# Altium PCB PCB1.PcbDoc (part 2 of 4)
Units mm, origin at the board's own origin, x right, y up, seen from the top; angles counter-clockwise.
Board outline 200 x 55 mm, 4 copper layers (Top Layer, Power Layer, GND Layer, Bottom Layer), stack 1.714 mm thick; 403 components, 272 nets, 1346 pads, 787 vias.
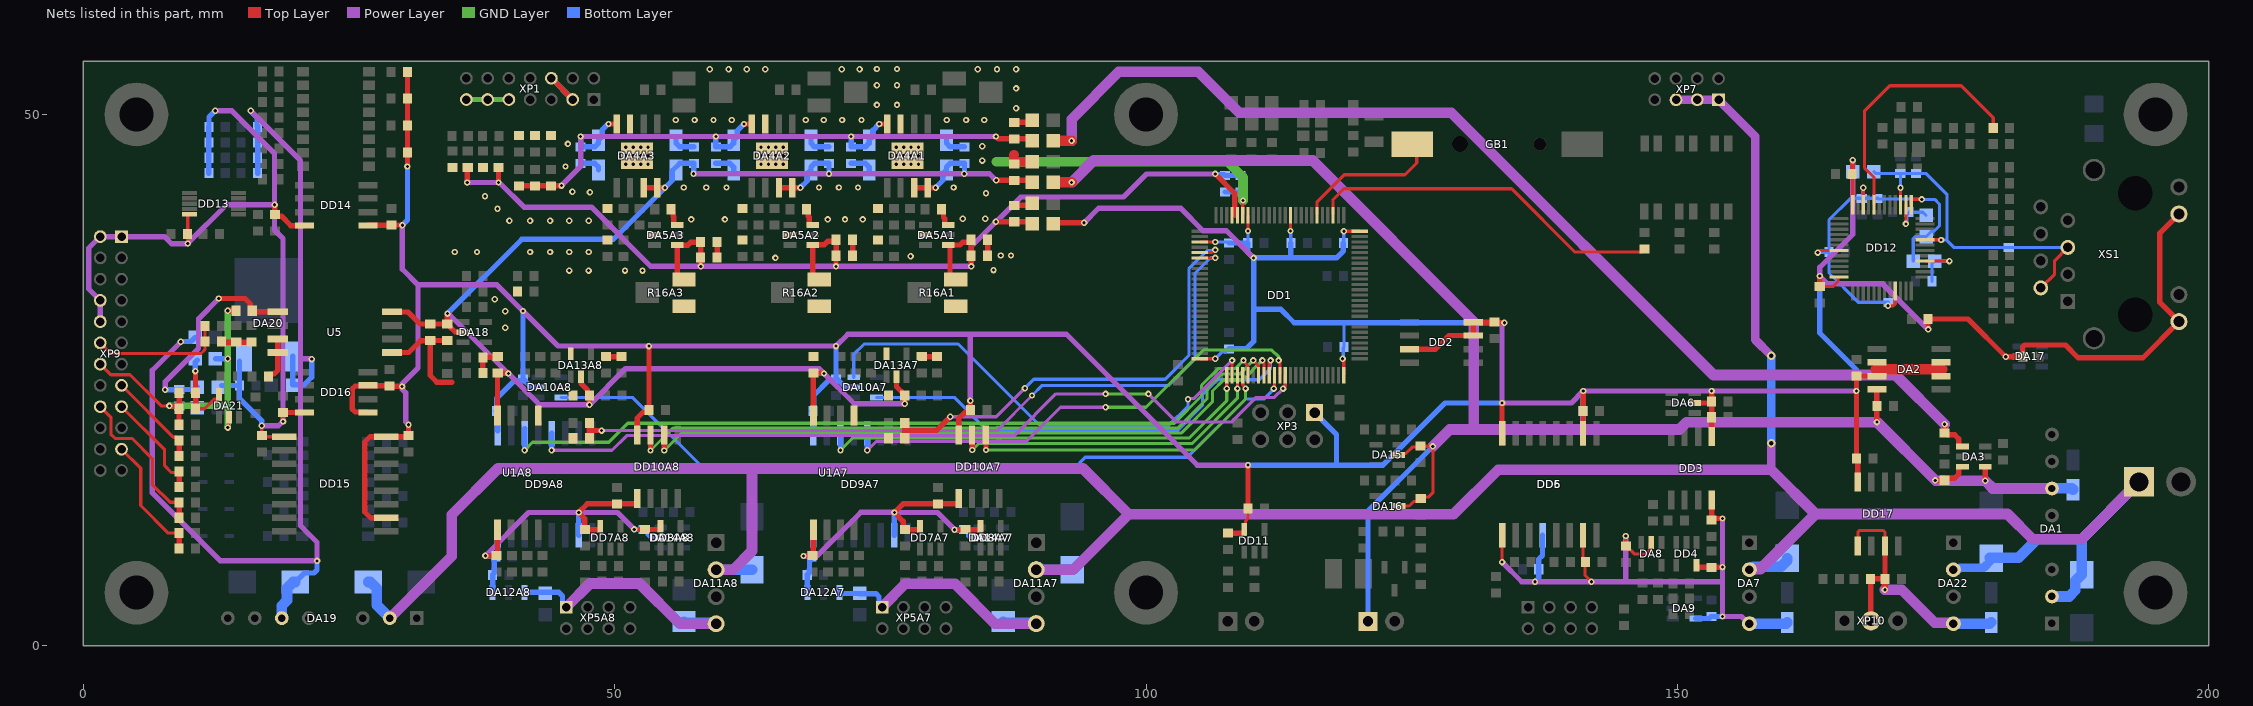
[diagram p4: the nets of this part, all layers, seen from the top]

## Part data
C1 C2 C28A1 C28A2 C28A3 C31A1 C31A2 C31A3 C39 C41 C51A7 C51A8 C58A7 C58A8 C111 C115 C120 C123: library part Capacitor_Polar
  C1 C39 C51A7 C51A8 C111 C115 C120: Model="TECAP, 10 мкФ, 35 В, тип C, 10%"
  C2 C28A1 C28A2 C28A3 C31A1 C31A2 C31A3 C41 C123: Model="TECAP, 10 мкФ, 10 В, тип A, 10%"
  C58A7 C58A8: Model="TECAP, 10 мкФ, 25 В, тип B, 10%"
C3 C4 C5 C6 C7 C8 C9 C10 C11 C12 C13 C14 C15 C16 C17 C18 C19 C20 C21 C22 C24 C26 C27A1 C27A2 C27A3 C29A1 C29A2 C29A3 C30A1 C30A2 C30A3 C32A1 C32A2 C32A3 C33A1 C33A2 C33A3 C34A1 C34A2 C34A3 C35A1 C35A2 C35A3 C36A4 C36A5 C37 C38 C40 C42 C43 C44 C45 C46 C47 C48 C49 C50 C52A7 C52A8 C53A7 C53A8 C54A7 C54A8 C55A7 C55A8 C56A7 C56A8 C57A7 C57A8 C59A7 C59A8 C60A7 C60A8 C61A7 C61A8 C62A7 C62A8 C63A7 C63A8 C64A7 C64A8 C65A7 C65A8 C66A7 C66A8 C67A7 C67A8 C68A7 C68A8 C69A7 C69A8 C70A7 C70A8 C71A7 C71A8 C72A7 C72A8 C73 C74 C75 C76 C77 C78 C79 C81 C82 C83 C84 C86 C88 C89 C90 C91 C92 C93 C94 C95 C96 C97 C98 C99 C100 C101 C102 C103 C104 C105 C106 C107 C108 C109 C110 C112 C113 C114 C116 C117 C118 C119 C121 C122 C124: library part Capacitor, Manufacturer=Murata
  C3 C4 C9 C10 C11 C12 C13 C14 C15 C17 C19 C20 C21 C26 C29A1 C29A2 C29A3 C30A1 C30A2 C30A3 C32A1 C32A2 C32A3 C34A1 C34A2 C34A3 C36A4 C36A5 C37 C38 C40 C42 C43 C45 C46 C47 C48 C49 C52A7 C52A8 C53A7 C53A8 C54A7 C54A8 C56A7 C56A8 C57A7 C57A8 C59A7 C59A8 C60A7 C60A8 C61A7 C61A8 C64A7 C64A8 C65A7 C65A8 C66A7 C66A8 C68A7 C68A8 C69A7 C69A8 C71A7 C71A8 C72A7 C72A8 C74 C75 C78 C79 C81 C82 C83 C84 C86 C88 C89 C90 C91 C92 C93 C94 C95 C96 C97 C98 C100 C101 C102 C103 C105 C106 C107 C109 C110 C113 C114 C117 C118 C119 C121 C122 C124: Model=GRM188R71H104KA93D
  C5 C7 C8: Model=GRM188R61E106KA73D
  C6 C73 C77 C116: Model=GRM188R61H105KAALD
  C16 C18 C35A1 C35A2 C35A3: Model=GRM188R61H225KE11D
  C22 C24: Model=GRM1885C1H180FA01D
  C27A1 C27A2 C27A3 C33A1 C33A2 C33A3: Model=GRM1885C1H220JA01D
  C44 C67A7 C67A8: Model=GRM188R71H103JA01D
  C50: Model=GRM188R71H152KA01D
  C55A7 C55A8 C62A7 C62A8 C70A7 C70A8 C76 C99 C104 C108: Model=GRM1885C1H101JA01D
  C63A7 C63A8 C112: Model=GRM219R71H334KA88D
C23 C25 C80 C85 C87: library part Capacitor, Manufacturer=Yageo
  C23 C25 C85 C87: Model=CC0603CRNPO9BN8R0
  C80: Model=CC1206KKX7RDBB102
DA1: library part TMR3, Manufacturer="Traco Power", Model="TMR 6-2411"
DA2: library part LD1117D33, Manufacturer=STMicroelectronics, Model=LD1117D33CTR
DA3 DA9: Manufacturer="Texas Instruments"
  DA3: Model=LM2776DBVR
  DA9: Model=LMV721M5
DA4A1 DA4A2 DA4A3 DD6 DD13: Manufacturer="Analog Devices"
  DA4A1 DA4A2 DA4A3: Model=ADA4817-1ARDZ
  DD6: Model=ADM3054BRWZ
  DD13: Model=ADM101EARM
DA5A1 DA5A2 DA5A3: library part TLV3501, Manufacturer="Texas Instruments", Model=TLV3501AIDBVR
DA6 DA10A7 DA10A8: library part SN74LVC1G3157, Manufacturer="Texas Instruments", Model=SN74LVC1G3157DBV
DA7 DA22: library part TME, Manufacturer="Traco Power", Model="TME 2405S"
DA8 DA13A7 DA13A8 DA14A7 DA14A8 DA15 DA16 DA18: library part LMC7101, Manufacturer="Texas Instruments", Model=LMC7101BIM5
DA11A7 DA11A8: library part TMU3, Manufacturer="Traco Power", Model="TMU 3-2412"
DA12A7 DA12A8: library part LD2981ABU50TR, Manufacturer=STMicroelectronics, Model=L78L05ABUTR
DA17: library part TPD4S009, Manufacturer="Texas Instruments", Model=TPD4S009DBVR
DA19: library part TMR4, Manufacturer="Traco Power", Model="TMR 4-2415"
DA20: library part L78M, Manufacturer=STMicroelectronics, Model=L78M05CDT-TR
DA21: library part LM7301IM5, Manufacturer="Texas Instruments", Model=LM7301IM5X/NOPB
DD1: library part STM32F405VG, Manufacturer=STMicroelectronics, Model=STM32F405VGT6
DD2: library part W25Q, Manufacturer=Winbond, Model=W25Q16JVSNIQ
DD3 DD10A7 DD10A8: library part ADUM1200, Manufacturer="Analog Devices", Model=ADUM1200CR
DD4: library part SN74AHC1G14, Manufacturer="Texas Instruments", Model=SN74AHC1G14DBV
DD5: library part ADUM1401, Manufacturer="Analog Devices", Model=ADUM1401CRW
DD7A7 DD7A8 DD8A7 DD8A8 DD11: library part SN74LVC1G17, Manufacturer="Texas Instruments", Model=SN74LVC1G17DBV
DD9A7 DD9A8 DD15: library part ADUM1400, Manufacturer="Analog Devices", Model=ADUM1400CRW
DD12: library part W5100S, Manufacturer=Wiznet, Model=W5100S-L
DD14: library part ADUM1201, Manufacturer="Analog Devices", Model=ADUM1201CR
DD16 DD17: library part ADUM1100, Manufacturer="Analog Devices", Model=ADUM1100BR
GB1: library part Accumulator, Manufacturer=Connfly, Model=DS1092-12-N8S
L1 L2 L3 L4 L5 L6 L7 L8: library part Inductor, Manufacturer=Murata, Model=BLM21PG221SN1D
R1 R2 R3 R4 R5 R6 R7 R8 R10A1 R10A2 R10A3 R12A1 R12A2 R12A3 R13A1 R13A2 R13A3 R14A1 R14A2 R14A3 R15A1 R15A2 R15A3 R17A4 R17A5 R18A4 R18A5 R19 R20 R21 R22 R23 R24 R25 R26 R27 R28A7 R28A8 R29A7 R29A8 R30A7 R30A8 R31A7 R31A8 R32A7 R32A8 R33A7 R33A8 R34A7 R34A8 R35A7 R35A8 R36A7 R36A8 R37A7 R37A8 R38A7 R38A8 R39A7 R39A8 R40 R41 R42 R43 R44 R45 R46 R47 R48 R49 R50 R51 R52 R53 R54 R55 R56 R57 R58 R59 R60 R61 R62 R63 R64 R65 R66 R67 R68 R69 R70 R71 R72 R73 R74 R75 R76 R77 R78 R79 R80 R81 R82 R83 R84 R85 R86 R87 R88 R89 R90 R91 R92 R93 R94 R95 R96 R97 R98 R99 R100 R101 R102 R103 R108 R109 R110 R111 R112 R113 R114 R115 R116: library part Resistor, Manufacturer=Yageo
  R1 R2 R3 R108 R110: Model=RC0805FR-070RL
  R4 R5 R13A1 R13A2 R13A3 R14A1 R14A2 R14A3 R15A1 R15A2 R15A3 R17A4 R17A5 R18A4 R18A5 R19 R22 R24 R26 R28A7 R28A8 R29A7 R29A8 R31A7 R31A8 R32A7 R32A8 R33A7 R33A8 R34A7 R34A8 R35A7 R35A8 R37A7 R37A8 R39A7 R39A8 R40 R42 R44 R45 R51 R66 R67 R68 R69 R70 R71 R73 R74 R75 R76 R77 R78 R79 R84 R85 R86 R87 R88 R89 R90 R91 R94 R99 R109 R111 R112 R114 R115 R116: Model=RC0603FR-0710KL
  R6 R7 R8 R43 R47 R48 R49 R95 R96 R97 R98: Model=RC0603FR-07200RL
  R10A1 R10A2 R10A3 R65 R100 R101 R102 R103: Model=RC0603FR-070RL
  R12A1 R12A2 R12A3: Model=RC0603FR-075K1L
  R20 R23: Model=RC0603FR-079K1L
  R21: Model=RC0603FR-07120RL
  R25 R27: Model=RC0603FR-073K6L
  R30A7 R30A8: Model=RC0603FR-0715KL
  R36A7 R36A8 R38A7 R38A8 R92 R93: Model=RC0603FR-0716K5L
  R41 R64: Model=RC0603FR-0712KL
  R46: Model=RC1210FR-0710RL
  R50 R58 R61: Model=RC0603FR-071KL
  R52 R53 R54 R55: Model=RC0603FR-0749R9L
  R56 R57 R59 R60: Model=RC0603FR-073R3L
  R62: Model=RC0603FR-07300RL
  R63: Model=RC0603FR-071ML
  R72: Model=RC0603FR-0740K2L
  R80 R81 R82 R83: Model=RC0603FR-07390RL
  R113: Model=RC0603FR-076K04L
R9A1 R9A2 R9A3 R16A1 R16A2 R16A3: library part Resistor_Variable, Manufacturer=Bourns
  R9A1 R9A2 R9A3: Model=3224W-1-205E
  R16A1 R16A2 R16A3: Model=3224W-1-103
R11A1 R11A2 R11A3 R104 R105 R106 R107: library part Resistor
U1A7 U1A8 U5: library part ACPL-C87, Manufacturer=Broadcom, Model=ACPL-C87A-500E
U2 U3 U4: library part TLP291, Manufacturer=Toshiba, Model=TLP291(GB-TP,SE
U6 U7: library part TLP281-4, Manufacturer=Toshiba, Model=TLP291-4
VD1 VD2 VD3: library part LED, Manufacturer=Kingbright
  VD1: Model=KP-2012MGC
  VD2: Model=KP-2012SYC
  VD3: Model=KP-2012EC
VD4 VD5 VD6 VD7: library part Diode_Zener, Manufacturer=Nexperia, Model=BZX384-C5V1
VT1: library part "MOSFET N-channel", Manufacturer=UMW, Model=AO3400A
XP1: library part Connector-14, Manufacturer=JST, Model=B14B-PHDSS
XP2 XP6 XP8: library part Connector-2, Manufacturer=JST
  XP2: Model=B2P-VH
  XP6 XP8: Model=B2B-EH-A
XP3: library part Connector-6, Manufacturer=Connfly, Model=PLD-6
XP4 XP5A7 XP5A8 XP7: library part Connector-8, Manufacturer=JST, Model=B8B-PHDSS
XP9: library part Connector-24, Manufacturer=JST, Model=B24B-PHDSS
XP10: library part Connector-3, Manufacturer=JST, Model=B3B-EH-A
XS1: Manufacturer=LINK-PP, Model=LPJD0012BENL
ZQ1: library part Quartz_Resonator, Manufacturer=NDK, Model="NX3215SA- 32.768K-STD-MUA-8"
ZQ2: library part Quartz_Resonator_4-pin, Manufacturer=NDK, Model=NX2520SA-16MHZ-STD-CSW-5
ZQ3: library part Quartz_Resonator_4-pin, Manufacturer=TXC, Model=7M-25.000MAAJ-T

## Free pads (board coordinates)
  round 6 hole 3.2: ""(5,5) ""(5,50) ""(100,5) ""(100,50) ""(195,5) ""(195,50)

## Via types
v1: diameter 0.6, hole 0.3, Top Layer to Bottom Layer, tented both sides, 747 vias
v2: diameter 0.6, hole 0.3, Top Layer to Bottom Layer, 36 vias
v3: diameter 0.8, hole 0.4, Top Layer to Bottom Layer, tented both sides, 4 vias

## Nets (pads, with @x,y where several pads share a name; then routed paths per layer and width w, separated by ;. In a path a pad name is that pad's centre, name@x,y a point inside that pad or via, vN(x,y) a via of type N, cw(c..) or ccw(c..) an arc to the next point about the centre after c; other vN are vias at no path point)
1V2A: C89.1 DD12.4 L5.2 | length 5.7
  Top Layer w0.3: DD12.4@173.3,36.2 v1(175.6,36.2)
  Bottom Layer w0.3: C89.1@173.95,34.3 173.95,35.95 L5.2@174.2,36.2 v1(175.6,36.2)
1V2D: C88.1 C92.1 C94.1 C95.1 DD12.13 DD12.22 DD12.31 DD12.45 L4.2 L5.1 | length 39.8
  Top Layer w0.3: v1(163.208,37) 163.408,37.2 DD12.31@165.2,37.2 ; DD12.22@167.5,41.5 167.5,42.3 v1(167.5,43.1) ; v1(169.821,32) 169.839,31.982 170.324,31.982 170.5,32.158 DD12.45@170.5,33.4 ; DD12.13@172,41.5 172,42 v1(173,42)
  Bottom Layer w0.3: v1(163.208,37) 164.22,37 C95.1@164.27,37.05 ; C92.1@167.5,42.11 C88.1@168.85,42.11 168.905,42.055 172.945,42.055 v1(173,42) 174.205,42 174.665,41.54 174.665,39.511 174.139,38.985 173.885,38.985 L4.2@173.4,38.5 172.376,38.5 172.2,38.324 L5.1@172.2,36.2 ; v1(167.5,43.1) 167.5,42.26 C92.1@167.35,42.11 166.31,42.11 164.27,40.07 164.27,37.2 C95.1@164.27,37.05 ; v1(169.821,32) 169.821,32.291 C94.1@169.85,32.32 167.03,32.32 164.27,35.08 C95.1@164.27,37.05
1V2O: C84.1 DD12.14 L4.1 | length 4.7
  Top Layer w0.3: v1(171.5,39.7) DD12.14@171.5,41.5
  Bottom Layer w0.3: v1(171.5,39.7) 171.577,39.777 171.577,40.577 C84.1@171.8,40.8 173.1,40.8 L4.1@173.4,40.5
+3.3V: C7.1 C9.1 C13.2 C14.2 C15.2 C19.1 C20.1 C26.1 C37.1 C38.1 C42.1 C43.1 C56A7.1 C56A8.1 C57A7.1 C57A8.1 C69A7.1 C69A8.1 C78.1 C81.1 C86.1 C91.1 C106.1 C107.1 C109.1 C124.1 DA2.2 DA2.3 DA2.6 DA2.7 DA6.5 DA10A7.5 DA10A8.5 DA17.5 DD1.11 DD1.19 DD1.28 DD1.50 DD1.75 DD1.100 DD2.3 DD2.7 DD2.8 DD3.1 DD5.10 DD5.16 DD6.7 DD9A7.1 DD9A8.1 DD10A7.8 DD10A8.8 DD11.5 DD12.24 DD12.36 DD14.1 DD15.10 DD15.16 DD16.1 DD16.3 DD17.8 L2.1 L6.1 R51.2 R66.2 R86.1 R87.1 R89.1 R91.1 XP3.1 XS1.9 XS1.11 | length 495.6
  Top Layer w0.3: DD1.50@105.075,27 v1(106.525,27) ; DD1.28@105.075,38 v1(106.525,38) ; DD11.5@109.125,10.6 109.25,10.725 DD11.5@109.25,10.95 109.375,11.075 109.375,11.75 109.6,11.975 C78.1@109.6,12.9 ; v1(109.6,39.025) DD1.19@109.6,40.525 ; v1(113.6,39.025) DD1.11@113.6,40.525 ; v1(118.5,27) 118.5,26.919 118.6,26.819 DD1.75@118.6,25.475 ; v1(118.625,39) DD1.100@120.125,39 ; C91.1@163.4,33.8 164.644,33.8 165.12,34.276 165.12,34.7 DD12.36@165.2,34.7 ; C86.1@166.475,44.425 C86.1@166.45,44.4 166.5,44.35 DD12.24@166.5,41.5 ; v1@166.475,45.675 v1(166.5,45.7)
  Top Layer w0.5: DD16.1@26.8,21.95 26.75,22 25.593,22 25.3,22.293 25.3,24.157 25.593,24.45 26.75,24.45 DD16.3@26.8,24.5 26.825,24.475 C109.1@28.775,24.475 ; DD14.1@26.8,39.55 26.825,39.575 28.975,39.575 28.987,39.588 30.013,39.588 v1(30.025,39.575) ; DD15.16@28.485,19.685 28.468,19.667 26.992,19.667 26.48,19.155 26.48,12.61 27.04,12.05 DD15.10@28.5,12.05 ; DD15.16@28.5,19.67 30.47,19.67 C107.1@30.6,19.8 v1(30.6,20.8) ; C109.1@28.825,24.425 28.831,24.419 29.981,24.419 v1(30,24.4) ; v1(30.5,45.1) R91.1@30.5,46.4 R87.1@30.5,51.5 R86.1@30.5,54 ; DD10A8.8@52.125,19.85 52.125,21.429 52.646,21.95 53.05,21.95 53.225,22.125 C69A8.1@53.225,22.175 v1(53.225,28.2) ; DD10A7.8@82.375,19.85 82.375,21.369 82.956,21.95 83.3,21.95 83.475,22.125 C69A7.1@83.475,22.175 v1(83.475,23.05) ; L2.1@91.275,39.7 91.376,39.801 v1(94.174,39.801) ; R51.2@107.7,10.6 DD11.5@109.125,10.6 ; C78.1@109.6,12.9 v1(109.6,17) ; DD2.3@124.796,27.896 127.221,27.896 128.521,29.196 DD2.7@130.796,29.196 DD2.8@130.796,30.446 C26.1@132.796,30.446 132.818,30.423 133.702,30.423 v1(133.725,30.4) ; DD5.16@133.506,20.01 v1(133.506,22.85) ; DD5.10@141.126,20.01 C43.1@141.126,21.838 ; C43.1@141.15,21.786 v1(141.15,23.975) ; DA6.5@151.625,22.85 153.1,22.85 C38.1@153.225,22.975 ; C37.1@153.225,21.55 C38.1@153.225,22.975 ; v1(153.225,23.975) C38.1@153.225,22.975 ; DD3.1@153.231,19.7 C37.1@153.231,21.55 ; C91.1@163.4,33.8 v1(163.4,34.8) ; C86.1@166.475,44.425 v1@166.475,45.675 ; DD17.8@166.989,15.4 166.989,17.486 C124.1@166.85,17.625 v1(166.85,23.975) 166.862,23.987 166.862,25.387 C7.1@166.875,25.4 166.887,25.388 DA2.3@168.788,25.388 ; DA2.3@168.8,25.375 DA2.3@168.788,25.388 ; DA2.3@168.825,25.425 DA2.3@168.788,25.388 ; v1(173.6,29.775) 173.587,29.788 173.587,30.738 R66.2@173.575,30.75 177.35,30.75 v1(180.9,27.2) 182.475,27.2 C81.1@182.5,27.225 182.5,28.124 182.676,28.3 186.512,28.3 187.712,27.1 193.8,27.1 XS1.9@197.2,30.5 195.4,32.3 195.4,38.83 XS1.11@197.2,40.63
  Top Layer w1: 168.675,26.025 168.8,26.025 174.8,26.025 174.926,26.025
  Power Layer w0.5: 30.025,35.432 31.499,33.958 ; 30.025,35.482 v1(30.025,39.575) ; v1(30.6,20.8) 30.6,20.827 30.344,21.083 30.344,23.8 30.019,24.125 30.019,24.381 v1(30,24.4) 30.019,24.419 30.019,24.675 31.499,26.155 31.499,33.958 ; v1(70.825,28.2) v1(53.225,28.2) 44.675,28.2 v1(41.375,31.5) 41.356,31.519 38.917,33.958 31.499,33.958 ; v1@70.844,28.219 71.943,29.318 83.475,29.318 ; v1(83.475,23.05) 83.475,29.318 ; v1(94.174,39.801) 95.55,41.176 103.249,41.176 ; 103.275,41.176 103.249,41.176 ; v1(109.6,17) 104.825,17 92.507,29.318 83.475,29.318 ; v1(110.125,36.5) 107.575,39.05 105.375,39.05 103.249,41.176 ; v1(133.506,22.85) 140.025,22.85 v1@141.131,23.956 ; v1@133.506,22.877 133.506,30.154 133.725,30.373 v1(133.725,30.4) ; v1(141.15,23.975) v1(153.225,23.975) v1(166.85,23.975) ; v1(166.5,45.7) 166.5,38.711 163.4,35.611 v1(163.4,34.8) 164.145,34.055 169.32,34.055 v1(173.6,29.775)
  Bottom Layer w0.3: v1(106.525,27) 107.175,27.65 107.5,27.65 107.825,27.975 107.849,27.999 C15.2@107.849,28.024 ; v1(106.525,38) 107.725,38 C14.2@107.825,37.9 ; C9.1@109.575,37.9 109.587,37.912 109.587,39.013 v1(109.6,39.025) ; v1(113.6,39.025) 113.612,39.013 C13.2@113.612,37.9 ; v1(118.5,27) 118.557,27.057 118.557,28.032 C20.1@118.625,28.1 118.625,30.4 ; C19.1@118.575,37.9 118.6,37.925 118.6,38.975 v1(118.625,39) ; L6.1@166.5,44.6 v1(166.5,45.7) ; v1(180.9,27.2) 180.912,27.212 182.137,27.212 DA17.5@182.15,27.225
  Bottom Layer w0.5: v1(30.025,39.575) 30.025,39.602 30.5,40.077 v1(30.5,45.1) ; DD9A8.1@38.99,20.209 38.99,21.967 38.857,22.1 38.92,22.163 38.92,23.297 40.569,24.946 41.221,24.946 C56A8.1@41.375,25.1 ; C56A8.1@41.375,25.125 v1(41.375,31.5) ; C56A8.1@41.425,25.1 41.6,24.925 41.6,24.875 42.125,24.35 42.775,24.35 DA10A8.5@42.8,24.325 ; C57A7.1@68.575,22.1 C57A7.1@68.64,22.165 ; C57A7.1@68.622,22.183 C57A7.1@68.64,22.165 ; DD9A7.1@68.705,20.2 68.705,22.1 C57A7.1@68.64,22.165 ; C56A7.1@70.825,25.1 C56A7.1@70.825,25.175 ; v1(70.825,28.2) C56A7.1@70.825,25.175 ; C56A7.1@70.875,25.175 71.7,24.35 72.475,24.35 DA10A7.5@72.5,24.325 ; C15.2@107.825,27.975 109.451,27.975 110.125,28.649 110.125,31.654 ; C14.2@107.825,37.9 C9.1@109.575,37.9 109.575,37.05 v1(110.125,36.5) ; v1(109.6,17) 117.925,17 ; C13.2@113.625,37.9 113.625,36.5 ; XP3.1@115.865,21.94 117.925,19.88 117.925,17 ; C19.1@118.575,37.9 118.575,37.15 117.925,36.5 113.625,36.5 ; v1(133.506,22.85) 128.15,22.85 122.3,17 117.925,17 ; v1(133.725,30.4) 118.625,30.4 113.95,30.4 112.696,31.654 110.125,31.654 ; DD6.7@141.108,20.01 C42.1@141.108,22.052 ; C42.1@141.15,21.868 v1(141.15,23.975) ; v1(163.4,34.8) 163.4,29.425 166.85,25.975 v1(166.85,23.975) ; C57A7.1@68.64,22.165 68.75,22.275 68.75,23.575 70.175,25 70.65,25 C56A7.1@70.825,25.175 ; 110.125,31.654 v1(110.125,36.5) ; v1(110.125,36.5) 113.625,36.5
+3.3VA: C10.1 C12.2 C17.2 C34A1.1 C34A2.1 C34A3.1 C35A1.1 C35A2.1 C35A3.1 DA5A1.4 DA5A2.4 DA5A3.4 DD1.21 DD1.22 L2.2 R16A1.3 R16A2.3 R16A3.3 R17A4.1 R17A5.1 | length 116.3
  Top Layer w0.3: DD1.22@108.1,40.525 108.35,40.525 DD1.21@108.6,40.525
  Top Layer w0.5: v1(36.125,43.593) 36.144,43.612 36.144,44.994 R17A5.1@36.175,45.025 ; v1(39.073,43.59) R17A4.1@39.073,45.018 ; R16A3.3@56.525,34.475 56.3,34.475 55.9,34.875 DA5A3.4@55.9,37.7 56.892,37.7 57.172,37.98 C34A3.1@58.1,37.98 ; v1@58.1,35.895 C35A3.1@58.1,36.525 ; C35A3.1@58.1,36.33 C34A3.1@58.1,37.7 ; DA5A2.4@68.65,37.7 68.65,34.775 R16A2.3@68.95,34.475 ; DA5A2.4@68.8,37.7 68.825,37.725 69.717,37.725 70.043,38.051 70.696,38.051 C34A2.1@70.85,38.205 C35A2.1@70.85,36.705 70.838,36.692 70.838,35.713 v1(70.825,35.7) ; R16A1.3@82.1,34.475 81.95,34.475 81.55,34.875 81.55,37.7 81.554,37.704 82.482,37.704 82.757,37.98 83.375,37.98 83.55,38.155 C34A1.1@83.55,38.205 ; v1(83.55,35.7) C35A1.1@83.55,36.705 C34A1.1@83.55,37.98 ; v1(85.875,39.9) C10.1@87.6,39.9 ; C10.1@87.625,39.9 89.075,39.9 L2.2@89.275,39.7 ; v1@106.544,44.381 108.35,42.575 108.35,40.525
  Power Layer w0.5: v1(36.125,43.593) v1@39.119,43.593 ; v1@39.146,43.593 v1@39.119,43.593 ; v1(106.525,44.4) 100.05,44.4 97.875,42.225 88.225,42.225 83.55,37.55 v1(83.55,35.7) v1(70.825,35.7) v1(58.1,35.7) 53.399,35.7 47.824,41.275 41.463,41.275 39.167,43.571 39.119,43.571 v1@39.119,43.593
  Bottom Layer w0.5: v1@36.125,43.566 v1(36.125,43.593) ; v1(106.525,44.4) 106.582,44.343 107.332,44.343 C17.2@107.425,44.25 ; C17.2@107.433,44.258 C12.2@108.841,44.258
+3.3VA_ETH: C79.1 C90.1 C93.1 DD12.8 DD12.15 L6.2 XS1.2 XS1.5 | length 33.6
  Top Layer w0.3: DD12.15@171,41.5 v1(171,43.1) ; DD12.8@173.3,38.2 174.797,38.2 v1(174.816,38.182) ; XS1.2@184.2,33.677 185.5,34.977 185.5,36.247 XS1.5@186.74,37.487
  Bottom Layer w0.3: L6.2@168.5,44.6 168.65,44.45 C90.1@170.975,44.45 ; v1(171,43.1) 171,44.425 C90.1@170.975,44.45 ; v1(174.816,38.182) 175.382,38.182 ; XS1.5@186.74,37.487 C79.1@181.179,37.487 176.013,37.487 175.382,38.118 175.382,42.433 173.365,44.45 C93.1@172.442,44.45 C90.1@170.975,44.45
+5V: C2.1 C4.2 C5.1 C74.1 C75.1 DA1.6 DA2.4 DA3.3 DA3.4 DA15.2 DA16.2 L1.1 XP6.1 | length 160.3
  Top Layer w0.3: DA15.2@123.937,18.085 123.941,18.088 124.46,18.088 125.088,18.716 125.764,18.716 C74.1@125.837,18.788 125.849,18.776 126.974,18.776 v1(126.987,18.763) ; DA16.2@123.95,13.15 124.755,13.15 125.184,13.579 125.579,13.579 C75.1@125.85,13.85 ; C75.1@125.85,13.9 125.85,14.007 126.607,14.007 127,14.4 v1@127,18.763 ; C4.2@168.775,22.55 168.775,24.1 DA2.4@168.8,24.125
  Top Layer w0.5: v1(168.775,21.05) DA2.4@168.775,24.1 ; v1(174.27,15.56) 174.278,15.567 175.142,15.567 C5.1@175.15,15.575 175.325,15.75 176.075,15.75 176.475,16.15 176.475,16.825 176.493,16.843 DA3.3@176.818,16.843 ; v1(178.975,15.525) DA3.4@178.975,16.85
  Top Layer w1: L1.1@91.275,43.6 v1(93,43.6)
  Power Layer w1: v1(93,43.6) 95.058,45.658 115.692,45.658 130.85,30.5 130.85,20.35 ; v1@126.993,18.757 128.587,20.35 130.85,20.35 ; v1(174.27,15.56) 168.78,21.05 150.88,21.05 150.18,20.35 130.85,20.35 ; v1@174.305,15.525 v1(178.975,15.525) 179.7,14.8 DA1.6@185.169,14.8
  Bottom Layer w0.5: XP6.1@120.896,2.3 120.896,12.673 v1(126.987,18.763)
  Bottom Layer w1: DA1.6@185.25,14.82 187.125,14.82 187.225,14.72 C2.1@187.225,14.675
+5V_DRVA7: C54A7.1 C59A7.1 C60A7.1 C64A7.1 C65A7.1 C68A7.1 C71A7.1 DA12A7.1 DA14A7.2 DD7A7.5 DD8A7.5 DD9A7.10 DD9A7.16 DD10A7.1 U1A7.1 | length 44
  Top Layer w0.5: v1(67.775,8.45) 67.787,8.463 68.587,8.463 C54A7.1@68.6,8.475 ; C54A7.1@68.625,8.475 68.7,8.55 U1A7.1@68.7,10.925 ; v1(76.325,12.538) 77.137,13.35 C64A7.1@80.425,13.35 82.325,13.35 82.375,13.4 DD10A7.1@82.375,13.85 ; v1@76.344,12.519 77.151,11.712 77.151,11.099 C59A7.1@77.325,10.925 ; C59A7.1@77.55,10.925 78.725,10.925 78.75,10.95 DD7A7.5@78.75,11.25 ; v1(81.975,10.925) C60A7.1@83,10.925 84.4,10.925 84.425,10.95 DD8A7.5@84.425,11.25
  Power Layer w0.5: v1(67.775,8.45) 69.05,8.45 73.157,12.557 v1@76.279,12.557 ; v1(76.325,12.538) 80.362,12.538 v1(81.975,10.925)
  Bottom Layer w0.3: C71A7.1@83,10.925 83.196,10.729 83.196,10.351 83.372,10.175 DA14A7.2@84.475,10.175
  Bottom Layer w0.5: v1(67.775,8.45) 67.787,8.438 68.562,8.438 C65A7.1@68.575,8.425 ; C68A7.1@68.12,6.62 68.12,5.028 DA12A7.1@68.145,5.003 ; C68A7.1@68.125,6.675 68.3,6.85 68.3,7.157 68.336,7.193 68.336,7.907 68.4,7.971 C65A7.1@68.4,8.2 ; C65A7.1@68.705,8.505 DD9A7.16@68.705,10.6 ; DD9A7.10@76.325,10.4 76.325,12.199 ; v1(81.975,10.925) C71A7.1@83,10.925
+5V_DRVA8: C54A8.1 C59A8.1 C60A8.1 C64A8.1 C65A8.1 C68A8.1 C71A8.1 DA12A8.1 DA14A8.2 DD7A8.5 DD8A8.5 DD9A8.10 DD9A8.16 DD10A8.1 U1A8.1 | length 44.2
  Top Layer w0.5: v1(37.835,8.475) C54A8.1@38.875,8.475 38.985,8.585 U1A8.1@38.985,10.925 ; DD7A8.5@48.65,11.25 48.65,10.95 48.625,10.925 47.175,10.925 47.175,11.978 v1(46.615,12.538) 47.426,13.35 C64A8.1@50.225,13.35 52.075,13.35 52.125,13.4 DD10A8.1@52.125,13.85 ; v1(51.85,10.95) C60A8.1@52.875,10.95 54.275,10.95 54.3,10.975 DD8A8.5@54.3,11.25
  Power Layer w0.5: v1(37.835,8.475) 41.898,12.538 v1(46.615,12.538) 50.262,12.538 v1(51.85,10.95)
  Bottom Layer w0.3: C71A8.1@52.725,10.95 52.775,10.95 53.05,10.675 53.05,10.45 53.325,10.175 DA14A8.2@54.35,10.175
  Bottom Layer w0.5: v1(37.835,8.475) 38.915,8.475 38.99,8.55 DD9A8.16@38.99,10.4 ; C68A8.1@38.5,6.675 38.675,6.85 38.675,7.193 38.675,8.25 C65A8.1@38.85,8.425 ; DA12A8.1@38.525,5.025 C68A8.1@38.525,6.65 ; DD9A8.10@46.61,10.4 46.612,10.402 46.612,12.536 v1(46.615,12.538) ; v1(51.85,10.95) C71A8.1@52.725,10.95
+5V_FS: C121.1 C122.1 C123.1 DA22.4 DD17.1 DD17.3 XP10.2 | length 26.2
  Top Layer w0.3: DD17.1@166.989,9.4 166.99,10.685 167.166,10.861 169.363,10.861 169.539,10.685 DD17.3@169.539,9.4
  Top Layer w0.5: XP10.2@168.225,2.35 168.2,2.375 168.2,6.275 C121.1@168.175,6.3 C122.1@169.525,6.3 ; C122.1@169.539,6.311 DD17.3@169.539,9.4
  Top Layer w0.6: v1(169.525,5.275) 169.525,6.297 C122.1@169.539,6.311
  Power Layer w1: v1(169.525,5.275) 171.1,5.275 174.223,2.152 175.898,2.152 DA22.4@175.975,2.075
  Bottom Layer w0.6: DA22.4@175.899,2.151 DA22.4@175.975,2.075
  Bottom Layer w1: DA22.4@175.975,2.075 179.4,2.075 C123.1@179.525,2.2
+5V_HW: C96.1 C101.1 C102.1 C113.1 C114.1 DA20.3 DD13.10 DD14.8 DD15.1 DD16.8 L7.1 R104.2 R105.2 R106.2 R107.2 XP9.1 XP9.2 XP9.8 XP9.10 | length 89.2
  Top Layer w0.3: v1(9.825,37.85) C96.1@9.825,38.75 9.825,40.55 9.875,40.6 DD13.10@10,40.6 ; C102.1@16.8,19.8 v1(16.8,20.7) ; C102.1@17.1,19.695 17.125,19.67 DD15.1@18.8,19.67 ; v1(18.8,21.1) C113.1@18.8,21.95
  Top Layer w0.5: v1(18,41.5) 18.013,41.487 18.013,40.612 C101.1@18.025,40.6 18.2,40.425 18.637,40.425 19.525,39.536 20.786,39.536 DD14.8@20.8,39.55 ; C113.1@18.8,21.95 DD16.8@20.8,21.95
  Power Layer w0.5: XP9.10@1.6,30.5 XP9.8@1.6,32.5 0.518,33.582 0.518,37.418 XP9.2@1.6,38.5 XP9.1@3.6,38.5 7.625,38.5 8.294,37.831 v1@9.779,37.831 ; v1(9.825,37.85) 13.475,41.5 v1(18,41.5) ; v1(12.425,50.35) 13.956,50.35 18,46.306 v1(18,41.5) ; v1(16.8,20.7) 18.373,20.7 18.773,21.1 v1(18.8,21.1) ; v1@18.8,21.127 18.8,38.325 18,39.125 v1(18,41.5)
  Bottom Layer w0.5: R104.2@11.809,44.475 R105.2@11.809,45.925 R107.2@11.809,48.825 ; R107.2@11.825,48.8 11.825,49.75 v1(12.425,50.35) ; L7.1@13,24.5 C114.1@14.7,24.5 ; DA20.3@14.7,26.804 C114.1@14.7,24.5 ; v1@16.767,20.733 16.781,20.746 16.781,21.194 14.7,23.275 C114.1@14.7,24.5
+5V_PS: C40.1 C41.1 C45.1 C46.1 C47.1 C48.1 C49.1 DA7.4 DA8.2 DA9.5 DD3.8 DD4.5 DD5.1 DD5.7 DD6.13 | length 66
  Top Layer w0.3: v1@133.456,7.875 v1(133.506,7.875) DD5.1@133.506,10.41 ; DD5.7@141.126,10.41 141.126,8.13 C47.1@141.356,7.9 ; C47.1@141.356,7.875 141.313,7.875 141.313,6.619 v1(141.906,6.025) ; v1(145.15,10.325) C46.1@145.15,9.375 145.2,9.375 145.925,8.65 146.164,8.65 ; 146.114,8.65 146.164,8.65 ; DA8.2@147.55,9.725 147.425,9.6 147.425,9.051 147.024,8.65 146.164,8.65
  Top Layer w0.5: DD4.5@151.8,7.575 151.8,7.4 151.825,7.375 C45.1@153.225,7.375 153.238,7.388 154.237,7.388 v1(154.25,7.4) ; C40.1@153.225,11.85 C40.1@153.225,11.975 ; DD3.8@153.225,13.7 C40.1@153.225,11.975 ; v1(154.25,11.975) C40.1@153.225,11.975
  Power Layer w0.5: v1(133.506,7.875) 135.356,6.025 v1(136.606,6.025) v1(141.906,6.025) 145.15,6.025 ; v1@145.15,10.298 145.15,6.025 ; v1(154.25,11.975) v1(154.25,7.4) 154.25,6.025 ; DA7.4@156.781,2.08 156.709,2.08 156.039,2.75 v1(154.25,2.75) 154.25,6.025 ; 145.15,6.025 154.25,6.025
  Bottom Layer w0.5: v1(136.606,6.025) 136.956,6.375 C48.1@136.956,7.2 136.956,8.15 137.316,8.51 DD6.13@137.316,10.4 DD6.13@137.316,10.41 ; DA9.5@151.725,2.575 153,2.575 153.175,2.75 C49.1@153.225,2.75 v1(154.25,2.75)
  Bottom Layer w1: DA7.4@156.781,2.08 160.25,2.08 160.35,2.18 C41.1@160.35,2.2
+5VA: C3.1 C30A1.1 C30A2.1 C30A3.1 C31A1.1 C31A2.1 C31A3.1 C61A7.1 C61A8.1 C66A7.1 C66A8.1 C103.1 C105.1 DA4A1.7 DA4A1.8 DA4A2.7 DA4A2.8 DA4A3.7 DA4A3.8 DA13A7.2 DA13A8.2 DA18.2 L1.2 U1A7.8 U1A8.8 U5.8 | length 152.2
  Top Layer w0.5: U5.8@29.05,31.425 29.067,31.408 30.567,31.408 31.7,30.275 C103.1@32.65,30.275 32.654,30.279 34.246,30.279 C105.1@34.25,30.282 ; C105.1@34.263,30.295 34.263,31.245 v1(34.275,31.257) ; C105.1@34.3,30.282 34.475,30.107 34.475,30.057 35,29.532 35.7,29.532 DA18.2@35.725,29.507 ; U1A8.8@38.985,21.675 C61A8.1@38.985,25.625 ; C61A8.1@38.998,25.638 39.004,25.631 39.994,25.631 v1(40,25.625) ; DA13A8.2@46.825,25.325 46.85,25.3 46.85,24.675 47.45,24.075 47.45,23.725 C66A8.1@47.625,23.55 v1(47.625,22.675) ; DA4A3.7@52.75,43.105 DA4A3.8@54,43.105 54.005,43.1 v1(54.725,43.1) ; DA4A2.7@65.466,43.105 65.471,43.1 v1(67.475,43.1) ; U1A7.8@68.7,21.675 68.7,25.6 68.75,25.65 68.762,25.638 69.688,25.638 v1(69.7,25.625) ; DA13A7.2@76.525,25.325 76.525,24.375 C66A7.1@77.262,23.638 ; v1(77.3,22.775) C66A7.1@77.3,23.55 ; DA4A1.7@78.2,43.105 78.205,43.1 v1(80.2,43.1) ; v1(85.9,43.8) 89.075,43.8 L1.2@89.275,43.6
  Power Layer w0.5: v1(34.275,31.257) 34.294,31.238 34.387,31.238 v1@39.981,25.644 ; v1(40,25.625) 42.95,22.675 v1(47.625,22.675) 51.025,26.075 69.25,26.075 v1(69.7,25.625) 72.55,22.775 v1@77.273,22.775 ; v1@57.675,44.425 v1(70.175,44.425) 85.248,44.425 85.873,43.8 v1(85.9,43.8)
  Bottom Layer w0.5: v1(34.275,31.257) 41.262,38.244 49.869,38.244 v1(54.725,43.1) 55.425,43.8 55.425,44.7 56.125,45.4 C30A3.1@57.45,45.4 57.437,45.387 57.437,44.438 v1(57.425,44.425) ; v1@67.494,43.119 68.125,43.75 68.125,44.425 C31A2.1@68.475,44.775 68.475,45.05 68.825,45.4 C30A2.1@70.175,45.4 v1(70.175,44.425) ; v1@80.219,43.119 80.875,43.775 80.875,44.425 C31A1.1@81.225,44.775 81.225,45.05 81.575,45.4 C30A1.1@82.925,45.4 82.912,45.387 82.912,44.438 v1(82.9,44.425)
+5VA_HW: C98.1 C118.1 L7.2 U5.1 | length 20.1
  Top Layer w0.5: v1(12.75,32.675) 15.233,32.675 15.725,32.183 15.725,31.7 16,31.425 U5.1@18.3,31.425
  Power Layer w0.5: v1(7.7,24.1) 7.7,24.832 10.841,27.973 10.841,30.766 v1(12.75,32.675)
  Bottom Layer w0.5: v1(7.7,24.1) 7.703,24.097 C118.1@9.032,24.097 ; C118.1@9.032,24.12 10.512,24.12 L7.2@10.717,24.325
+12V_DRVA7: C58A7.1 C63A7.2 DA11A7.4 DA12A7.3 XP5A7.1 | length 25.2
  Top Layer w1: DA11A7.4@89.665,2.075 DA11A7.4@89.675,2.085
  Power Layer w1: XP5A7.1@75.185,3.653 77.357,5.825 82.023,5.825 85.773,2.075 DA11A7.4@89.7,2.075
  Bottom Layer w0.5: DA12A7.3@71.145,5.003 71.145,4.947 71.18,4.912 C63A7.2@73.045,4.912 ; C63A7.2@73.053,4.903 74.589,4.903 74.882,4.611 74.882,3.956 XP5A7.1@75.185,3.653
  Bottom Layer w1: C58A7.1@86.575,2.275 86.675,2.175 89.6,2.175 DA11A7.4@89.7,2.075
+12V_DRVA8: C58A8.1 C63A8.2 DA11A8.4 DA12A8.3 XP5A8.1 | length 24.6
  Power Layer w1: XP5A8.1@45.45,3.625 47.688,5.863 52.336,5.863 56.125,2.075 DA11A8.4@59.55,2.075
  Bottom Layer w0.5: DA12A8.3@41.525,5.025 44.758,5.025 45.1,4.683 45.1,3.975 XP5A8.1@45.45,3.625
  Bottom Layer w1: C58A8.1@56.525,2.275 56.625,2.175 59.45,2.175 DA11A8.4@59.55,2.075
+24V: C1.1 C39.1 C51A7.1 C51A8.1 C111.1 C120.1 DA1.2 DA7.2 DA11A7.2 DA11A8.2 DA19.2 DA22.2 XP2.1 XP7.1 XP7.3 XP7.5 | length 296.9
  Power Layer w0.8: XP7.5@149.875,51.375 XP7.3@151.875,51.375 XP7.1@153.875,51.375 157.324,47.926 157.324,28.801 v3(158.825,27.3) ; 158.831,16.569 v3(158.831,19.05)
  Power Layer w1: DA19.2@28.84,2.6 34.675,8.435 34.675,12.333 39.025,16.683 62.925,16.683 ; DA11A8.2@59.55,7.155 61.155,7.155 62.925,8.925 62.925,16.683 ; DA11A7.2@89.7,7.155 93.157,7.155 98.376,12.374 ; DA7.2@156.781,7.16 156.848,7.226 157.826,7.226 163,12.4 ; XP2.1@193.44,15.425 188.05,10.035 183.432,10.035 181.067,12.4 163,12.4 ; 62.925,16.683 94.067,16.683 98.376,12.374 ; 98.376,12.374 128.939,12.374 133.134,16.569 158.831,16.569 163,12.4
  Bottom Layer w0.8: v3(158.831,19.05) v3@158.831,27.3 ; DA22.2@175.975,7.155 176.09,7.27 176.514,7.27 176.582,7.337 178.825,7.337 179.525,8.037 C120.1@179.525,8.225
  Bottom Layer w1: C111.1@26.8,6 27,6 27.6,5.4 27.6,3.84 DA19.2@28.783,2.657 ; DA11A8.2@59.55,7.155 59.552,7.153 62.923,7.153 C51A8.1@62.925,7.15 ; DA11A7.2@89.675,7.165 89.682,7.158 93.067,7.158 C51A7.1@93.075,7.15 ; DA7.2@156.781,7.16 156.89,7.16 157.15,7.42 159.164,7.42 159.169,7.425 159.75,7.425 160.35,8.025 C39.1@160.35,8.225 ; C120.1@179.395,8.295 182.095,8.295 183.835,10.035 188.05,10.035 ; DA1.2@185.25,4.64 186.864,4.64 187.45,5.226 187.45,6.1 C1.1@188.05,6.7 188.05,10.035 ; XP2.1@193.44,15.425 188.05,10.035
+24V_HW: C112.2 C115.1 DA19.6 DA20.1 L8.1 R100.2 R101.2 R102.2 R103.2 | length 101.1
  Power Layer w0.5: v1(9.175,28.6) 6.5,25.925 6.5,14.391 12.903,7.988 v1(22,7.988) 22,9.741 20.442,11.298 20.442,26.994 ; v1(15.75,50.35) 20.442,45.658 20.442,26.994 ; v1@21.481,26.994 20.442,26.994
  Bottom Layer w0.5: v1(9.175,28.6) 9.202,28.6 9.232,28.63 10.133,28.63 L8.1@10.518,29.015 ; v1(15.75,50.35) 15.75,50.323 16.348,49.725 16.348,48.886 R103.2@16.409,48.825 ; R100.2@16.409,44.475 R101.2@16.409,45.925 R102.2@16.409,47.375 R103.2@16.409,48.825 ; R103.2@16.409,48.875 R103.2@16.409,48.825 ; DA20.1@19.7,27.229 C112.2@19.7,24.535 19.732,24.567 20.792,24.567 21.5,25.275 v1(21.5,26.975) ; C115.1@19.959,6 20.804,6.845 21.707,6.845 22,7.138 v1(22,7.988)
  Bottom Layer w1: DA19.6@18.68,2.6 18.68,3.78 19.169,4.269 19.169,5.4 19.769,6 C115.1@19.959,6
+24VA_HW: C117.1 C119.1 DA21.5 L8.2 | length 7.7
  Top Layer w0.3: v1(10.55,25.85) v1@10.558,25.842 ; C117.1@10.575,22.3 C117.1@10.575,22.3 11.408,22.3 12.308,23.2 12.633,23.2 12.758,23.325 DA21.5@12.758,23.65
  Top Layer w0.5: C119.1@10.558,23.823 v1@10.558,25.842 ; C117.1@10.575,22.3 C119.1@10.574,23.864
  Bottom Layer w0.5: v1(10.55,25.85) 10.534,25.866 10.534,26.67 L8.2@10.753,26.888
+VBAT: DD1.6 GB1.2 | length 13.9
  Top Layer w0.3: DD1.6@116.1,40.525 116.1,41.777 118.648,44.325 124.375,44.325 125.475,45.425 GB1.2@125.475,47.2
-5V: C8.1 DA3.1 L3.1 | length 104.9
  Top Layer w0.5: v1(175.15,20.85) C8.1@175.15,20.025 175.325,19.85 176.1,19.85 176.475,19.475 176.475,18.775 176.5,18.75 DA3.1@176.825,18.75
  Top Layer w1: L3.1@91.275,47.5 91.3,47.525 v1(93,47.525)
  Power Layer w1: v1(93,47.525) 93,49.55 97.45,54 104.925,54 108.775,50.15 128.725,50.15 153.4,25.475 170.525,25.475 v1(175.15,20.85)
-5VA: C11.1 C28A1.2 C28A2.2 C28A3.2 C29A1.1 C29A2.1 C29A3.1 DA4A1.4 DA4A2.4 DA4A3.4 L3.2 R10A1.1 R10A2.1 R10A3.1 | length 69.2
  Top Layer w0.5: R10A1.1@41,43.3 42.525,43.3 44.05,43.3 v1(45,43.3) ; v1(49.425,49.1) 50.195,49.1 DA4A3.4@50.2,49.105 ; v1(62.175,49.1) 62.911,49.1 DA4A2.4@62.916,49.105 ; v1(74.9,49.1) 75.645,49.1 DA4A1.4@75.65,49.105 ; v1(85.875,47.925) 85.902,47.925 86.127,47.7 89.1,47.7 L3.2@89.25,47.55
  Power Layer w0.5: v1(45,43.3) 46.8,45.1 v1(46.8,47.925) v1(59.525,47.925) v1(72.25,47.925) ; v1@72.277,47.925 v1(85.875,47.925)
  Bottom Layer w0.5: v1(46.8,47.925) C29A3.1@46.8,46.95 48.125,46.95 48.475,47.3 C28A3.2@48.475,47.575 48.825,47.925 48.825,48.531 49.375,49.081 49.406,49.081 v1(49.425,49.1) ; v1(59.525,47.925) C29A2.1@59.525,46.95 60.85,46.95 61.2,47.3 C28A2.2@61.2,47.575 61.55,47.925 61.55,48.475 v1@62.156,49.081 ; v1(72.25,47.925) C29A1.1@72.25,46.95 73.6,46.95 73.95,47.3 C28A1.2@73.95,47.575 74.3,47.925 74.3,48.5 v1@74.881,49.081
ACTn: DD12.20 R58.2 | length 24.5
  Top Layer w0.3: DD12.20@168.5,41.5 168.5,44.1 167.6,45 167.6,50.3 170,52.7 176.7,52.7 179.725,49.675 R58.2@179.725,48.712
AGND: C3.2 C10.2 C11.2 C12.1 C17.1 C28A1.1 C28A2.1 C28A3.1 C29A1.2 C29A2.2 C29A3.2 C30A1.2 C30A2.2 C30A3.2 C31A1.2 C31A2.2 C31A3.2 C32A1.2 C32A2.2 C32A3.2 C33A1.2 C33A2.2 C33A3.2 C34A1.2 C34A2.2 C34A3.2 C35A1.2 C35A2.2 C35A3.2 C36A4.2 C36A5.2 C61A7.2 C61A8.2 C62A7.2 C62A8.2 C66A7.2 C66A8.2 C72A7.2 C72A8.2 C103.2 C104.2 C105.2 C110.2 DA4A1.3 DA4A1.EPAD DA4A2.3 DA4A2.EPAD DA4A3.3 DA4A3.EPAD DA5A1.2 DA5A1.6 DA5A2.2 DA5A2.6 DA5A3.2 DA5A3.6 DA13A7.5 DA13A8.5 DD1.20 R1.2 R2.2 R3.2 R11A1.2 R11A2.2 R11A3.2 R13A1.2 R13A2.2 R13A3.2 R16A1.1 R16A2.1 R16A3.1 R36A7.2 R36A8.2 R92.2 U1A7.5 U1A8.5 U5.5 XP1.3 XP1.6 XP1.9 XP1.11 XP1.13 | length 92
  Top Layer w0.3: DD1.20@109.1,40.525 109.1,41.875 v1(109.125,41.9)
  Top Layer w0.5: U5.5@29.05,27.6 30.625,27.6 31.72,28.695 32.62,28.695 C103.2@32.65,28.725 ; C105.2@34.25,28.725 C103.2@32.65,28.725 ; 34.666,24.8 33.275,24.8 32.65,25.425 C103.2@32.65,28.725 ; C104.2@37.604,25.679 C104.2@37.6,25.682 R92.2@37.6,27.132 37.628,27.16 38.963,27.16 C61A8.2@38.994,27.191 ; XP1.6@44.05,53.4 XP1.3@46.05,51.4 ; R36A8.2@49.2,27.2 C62A8.2@50.65,27.2 ; C33A3.2@55.325,41.025 55.5,40.85 55.5,40.425 55.55,40.375 55.55,39.625 55.575,39.6 DA5A3.6@55.9,39.6 ; C35A3.2@59.65,36.525 C34A3.2@59.65,37.98 ; C33A2.2@68.05,41.075 68.225,40.9 68.225,40.425 68.325,40.325 68.325,39.625 68.35,39.6 DA5A2.6@68.65,39.6 ; C35A2.2@72.4,36.705 C34A2.2@72.4,38.205 ; R36A7.2@78.9,27.2 C62A7.2@80.35,27.2 ; C33A1.2@80.775,41.075 80.95,40.9 80.95,40.297 81.05,40.197 81.05,39.625 81.075,39.6 DA5A1.6@81.4,39.6 ; C35A1.2@85.1,36.705 C34A1.2@85.1,38.205 ; C11.2@87.6,49.25 89.075,49.25 R3.2@89.275,49.45 ; C10.2@87.625,41.45 89.075,41.45 R2.2@89.275,41.65
  Top Layer w0.9: 87.6,46.225 87.575,46.2 87.575,45.55 R1.2@89.275,45.55
  GND Layer w0.5: XP1.13@36.05,51.4 XP1.9@40.05,51.4 ; XP1.6@44.05,53.4 XP1.3@46.05,51.4
  GND Layer w0.9: 85.899,45.555 107.659,45.555 109.125,44.09 v1(109.125,41.9)
  Bottom Layer w0.5: XP1.13@36.05,51.4 XP1.11@38.05,51.4 XP1.9@40.05,51.4 ; XP1.6@44.05,53.4 XP1.3@46.05,51.4 ; C29A3.2@46.8,45.4 48.125,45.4 48.475,45.05 C28A3.1@48.475,44.775 ; C31A3.2@55.775,47.575 55.775,47.3 56.125,46.95 C30A3.2@57.45,46.95 ; C29A2.2@59.525,45.4 60.85,45.4 61.2,45.05 C28A2.1@61.2,44.775 ; C31A2.2@68.475,47.575 68.475,47.3 68.825,46.95 C30A2.2@70.175,46.95 ; C29A1.2@72.25,45.4 73.6,45.4 73.95,45.05 C28A1.1@73.95,44.775 ; C31A1.2@81.225,47.575 81.225,47.3 81.575,46.95 C30A1.2@82.925,46.95 ; C17.1@107.425,42.7 107.429,42.704 108.887,42.704 C12.1@108.891,42.708 108.931,42.708 109.106,42.533 109.106,41.918 v1@109.124,41.9
  other v1: 39.7,29.925 39.7,31.475 38.725,32.6 45.725,35.3 47.55,35.3 50.975,35.3 52.625,35.3 85.65,35.35 65.125,36.5 77.85,36.65 86.325,36.725 87.3,36.725 34.95,37.05 37.05,37.05 42.05,37.05 43.925,37.05 45.725,37.05 47.559,37.05 40.1,40 42.05,40 43.925,40 45.725,40 47.559,40 57.2,40.125 60.375,40.125 70.05,40.125 71.675,40.125 73.35,40.125 82.75,40.175 84.875,40.175 38.975,41.125 37.8,42.3 84.95,42.575 47.675,42.675 46.025,42.725 56.5,43.125 58.625,43.125 60.525,43.125 69.225,43.125 71.1,43.125 72.9,43.125 81.9,43.125 45.375,45.1 84.6,45.65 84.6,47 45.6,47.225 55.75,49.475 57.525,49.475 59.3,49.475 61.025,49.475 67.975,49.475 69.675,49.475 71.4,49.475 73.225,49.475 81.25,49.475 83.075,49.475 84.775,49.475 87.775,50.575 74.675,50.9 76.575,50.9 87.775,52.45 74.675,52.75 76.575,52.75 58.95,54.25 60.725,54.25 62.425,54.25 64.175,54.25 71.375,54.25 73.05,54.25 84.175,54.25 85.975,54.25 87.775,54.25 74.675,54.275 76.575,54.275
  other v2: 51.05,45.305 51.75,45.305 52.45,45.305 53.15,45.305 63.766,45.305 64.466,45.305 65.166,45.305 65.866,45.305 76.5,45.305 77.2,45.305 77.9,45.305 78.6,45.305 51.05,46.105 51.75,46.105 52.45,46.105 53.15,46.105 63.766,46.105 64.466,46.105 65.166,46.105 65.866,46.105 76.5,46.105 77.2,46.105 77.9,46.105 78.6,46.105 51.05,46.905 51.75,46.905 52.45,46.905 53.15,46.905 63.766,46.905 64.466,46.905 65.166,46.905 65.866,46.905 76.5,46.905 77.2,46.905 77.9,46.905 78.6,46.905
AGND_HW: C98.2 C99.1 C116.2 C117.2 C118.2 C119.2 DA21.2 R69.2 R76.2 R108.2 R109.1 R110.2 U5.3 U5.4 XP9.14 | length 42.1
  Top Layer w0.3: XP9.14@1.6,26.5 2.6,25.5 4.4,25.5 7.325,22.575 v1(8.1,22.575) ; C117.2@9.024,22.426 C117.2@9.025,22.3 C117.2@9.025,22.3 ; v1(13.6,20.525) 13.654,20.579 13.654,21.446 DA21.2@13.708,21.5
  Top Layer w0.5: v1(8.1,22.575) 8.875,22.575 C117.2@9.024,22.426 ; C116.2@9,20.802 C117.2@9,22.275 ; C119.2@9.024,23.864 C117.2@9.024,22.426 ; C117.2@9.152,22.298 C117.2@9.024,22.426 ; R69.2@12.991,28.625 13.041,28.575 R76.2@14.391,28.575 C99.1@15.841,28.575 ; R109.1@17.408,25.345 17.408,25.395 17.583,25.57 17.948,25.57 18.3,25.921 U5.4@18.3,27.6 U5.3@18.3,28.875 U5.3@17.668,28.875
  Top Layer w0.6: v1(13.6,31.525) C98.2@14.35,31.525
  GND Layer w0.6: v1(8.1,22.575) 13.6,22.575 ; v1(13.6,20.525) 13.6,22.575 ; v1(13.6,31.525) v1(13.6,27) 13.6,22.575
  Bottom Layer w0.3: R110.2@12.438,27.015 R110.2@12.453,27
  Bottom Layer w0.5: v1(8.1,22.575) 10.542,22.575 R108.2@10.717,22.4 ; R110.2@12.453,27 12.46,27.008 13.592,27.008 v1(13.6,27)
AN_MOD_HW: R69.1 R72.2 XP9.12 | length 12.6
  Top Layer w0.3: XP9.12@1.6,28.5 2.6,27.5 11.076,27.5 11.441,27.865 R69.1@11.441,28.625 ; R69.1@11.441,28.599 R72.2@11.441,30.075
COM1_HW: R71.2 R78.1 XP9.17 | length 10.4
  Top Layer w0.3: XP9.17@3.6,22.5 7.648,18.452 7.648,16.952 8.3,16.3 R71.2@9.025,16.3
  Top Layer w0.5: R78.1@9.025,14.8 R71.2@9.025,16.3
COM2_HW: R74.2 R85.1 XP9.18 | length 15
  Top Layer w0.3: XP9.18@1.6,22.5 2.6,21.5 2.6,19.9 3,19.5 4.6,19.5 6.5,17.6 6.5,15.169 8.169,13.5 R74.2@9.025,13.5
  Top Layer w0.5: R85.1@9.025,12.05 R74.2@9.025,13.5
COM3_HW: R77.2 R79.1 XP9.21 | length 12.2
  Top Layer w0.3: XP9.21@3.6,18.5 5.4,16.7 5.4,13.2 8,10.6 R77.2@9.025,10.6
  Top Layer w0.5: R79.1@9.025,9.15 R77.2@9.025,10.6
CRASH_IND: DD1.3 R49.2 | length 33.8
  Top Layer w0.3: DD1.3@117.6,40.525 117.6,41.975 118.625,43 134.4,43 140.35,37.05 146.625,37.05 R49.2@146.9,37.325
DIG_MOD_HW: R68.2 R84.1 XP9.15 | length 9.1
  Top Layer w0.3: XP9.15@3.6,24.5 8.475,19.625 8.75,19.625 9.025,19.35 R68.2@9.025,19.3
  Top Layer w0.5: R84.1@9.025,17.8 R68.2@9.025,19.3
DRV1_AN_MOD: DD1.63 DD9A7.5 | length 46.3
  Top Layer w0.3: v1(112.475,26.85) 112.475,26.769 112.6,26.644 DD1.63@112.6,25.475
  Power Layer w0.3: v1(73.775,18.4) 73.784,18.4 74.639,19.254 88.754,19.254 91.95,22.45 v1(96.2,22.45)
  GND Layer w0.3: v1(96.2,22.45) 100,22.45 105.375,27.825 111.85,27.825 112.493,27.182 112.493,26.868 v1(112.475,26.85)
  Bottom Layer w0.5: v1(73.775,18.4) 73.78,18.405 73.78,19.995 DD9A7.5@73.785,20
DRV1_CUR: C72A7.1 DD1.30 R39A7.2 | length 44.1
  Top Layer w0.3: DD1.30@105.075,37 106.176,37 106.369,37.193 106.468,37.193 v1(106.525,37.25)
  Top Layer w0.5: C72A7.1@77.3,19.525 77.3,20.25 ; R39A7.2@77.3,20.975 77.3,20.25 ; v1(81.575,21.55) 81.575,21.523 80.302,20.25 77.3,20.25
  Power Layer w0.3: v1(81.575,21.55) 85.925,21.55 v1(88.6,24.225)
  Bottom Layer w0.3: v1(88.6,24.225) 89.45,25.075 101.801,25.075 104.041,27.315 104.041,35.466 105.768,37.193 106.468,37.193 v1(106.525,37.25)
DRV1_DIG_MOD: DA10A7.3 DD1.61 | length 43.5
  Top Layer w0.3: DD1.61@111.6,25.475 111.6,26.644 111.725,26.769 v1(111.725,26.85)
  Bottom Layer w0.3: DA10A7.3@74.65,23.375 81.95,23.375 85.075,20.25 102.925,20.25 105.33,22.655 105.33,23.655 106.715,25.04 110.64,25.04 111.725,26.125 v1(111.725,26.85)
DRV1_ERR1: DD1.55 DD10A7.7 | length 30.7
  Top Layer w0.3: v1(108.6,24.2) DD1.55@108.6,25.475
  Top Layer w0.5: DD10A7.7@83.625,19.975 83.638,19.962 83.638,18.437 v1(83.65,18.425)
  GND Layer w0.3: v1(83.65,18.425) 84.259,19.034 104.359,19.034 108.6,23.275 v1(108.6,24.2)
DRV1_ERR2: DD1.56 DD10A7.6 | length 30.3
  Top Layer w0.3: DD1.56@109.1,25.475 109.1,24.556 109.375,24.281 v1(109.375,24.2)
  Top Layer w0.5: DD10A7.6@84.925,19.975 84.938,19.962 84.938,18.437 v1(84.95,18.425)
  GND Layer w0.3: v1(84.95,18.425) 104.575,18.425 109.375,23.225 v1(109.375,24.2)
DRV1_ON: DD1.53 DD9A7.3 | length 42.5
  Top Layer w0.3: v1(107.6,24.2) DD1.53@107.6,25.475
  GND Layer w0.3: v1@71.268,18.418 72.403,19.553 104.078,19.553 107.6,23.075 v1(107.6,24.2)
  Bottom Layer w0.3: DD9A7.3@71.245,20.2 DD9A7.3@71.248,20.198 ; v1@71.248,18.402 v1(71.25,18.4)
  Bottom Layer w0.5: v1@71.248,18.402 DD9A7.3@71.248,20.198
DRV1_SEL_DIG: DA10A7.6 DD1.54 | length 45.6
  Top Layer w0.3: DD1.54@108.1,25.475 v1(108.1,26.85)
  Power Layer w0.3: v1(103.95,23.2) 104.007,23.257 104.507,23.257 v1(108.1,26.85)
  Bottom Layer w0.3: DA10A7.6@72.5,25.275 72.5,27.429 73.471,28.4 82.324,28.4 90.024,20.7 102.098,20.7 103.95,22.552 v1(103.95,23.2)
DRV2_AN_MOD: DD1.64 DD9A8.5 | length 76
  Top Layer w0.3: 113.1,24.456 DD1.64@113.1,25.475
  Power Layer w0.3: v1(44.071,18.4) 49.75,18.4 51.125,19.775 87.6,19.775 91.525,23.7 v1(96.2,23.7) ; v1(100.225,23.7) 102.86,21.065 108.075,21.065 110.381,23.372 112.072,23.372 v1(112.9,24.2)
  GND Layer w0.3: v1(96.2,23.7) v1(100.225,23.7)
  Bottom Layer w0.5: v1(44.071,18.4) DD9A8.5@44.07,20
DRV2_CUR: C72A8.1 DD1.31 R39A8.2 | length 73.3
  Top Layer w0.3: 47.625,20.175 47.7,20.25 ; DD1.31@105.075,36.5 v1(106.525,36.5)
  Top Layer w0.5: C72A8.1@47.625,19.525 47.625,20.175 R39A8.2@47.625,20.975 ; 47.7,20.25 v1(48.775,20.25)
  Power Layer w0.3: v1(48.775,20.25) 85.975,20.25 v1(89.275,23.55)
  Bottom Layer w0.3: v1(89.275,23.55) 90.225,24.5 102.165,24.5 104.613,26.948 104.613,35.044 106.067,36.498 106.523,36.498 v1(106.525,36.5)
DRV2_DIG_MOD: DA10A8.3 DD1.62 | length 74.2
  Top Layer w0.3: v1(112.025,24.2) 112.025,24.281 112.1,24.356 DD1.62@112.1,25.475
  Bottom Layer w0.3: DA10A8.3@44.95,23.375 51.675,23.375 58.367,16.683 93.228,16.683 94.282,17.737 103.887,17.737 109.36,23.21 111.085,23.21 v1@112.025,24.15
DRV2_ERR1: DD1.59 DD10A8.7 | length 63.8
  Top Layer w0.3: v1(110.1,26.85) 110.1,26.824 110.6,26.324 DD1.59@110.6,25.475
  Top Layer w0.5: v1(53.375,18.375) DD10A8.7@53.375,19.775
  GND Layer w0.3: v1(53.375,18.375) 55.486,20.486 103.004,20.486 105.745,23.227 105.745,24.241 107.068,25.565 108.815,25.565 v1(110.1,26.85)
DRV2_ERR2: DD1.60 DD10A8.6 | length 63.2
  Top Layer w0.3: v1(110.95,26.85) 110.95,26.769 111.1,26.619 DD1.60@111.1,25.475
  Top Layer w0.5: v1(54.675,18.375) DD10A8.6@54.675,19.775
  GND Layer w0.3: v1(54.675,18.375) 56.336,20.036 103.348,20.036 106.262,22.95 106.262,23.977 107.325,25.04 109.14,25.04 v1(110.95,26.85)
DRV2_ON: DD1.57 DD9A8.3 | length 75.3
  Top Layer w0.3: v1(109.175,26.85) 109.175,26.769 109.6,26.344 DD1.57@109.6,25.475
  GND Layer w0.3: v1(41.525,18.4) 42.27,19.146 49.446,19.146 51.236,20.936 102.661,20.936 105.225,23.5 105.225,24.5 106.829,26.104 108.429,26.104 v1(109.175,26.85)
  Bottom Layer w0.3: v1(41.525,18.4) v1@41.527,18.403 ; DD9A8.3@41.525,20.449 DD9A8.3@41.527,20.447
  Bottom Layer w0.5: v1@41.527,18.403 DD9A8.3@41.527,20.447